# EAGLE board vocore2-eagle (EAGLE 7.7.0), part 1 of 2
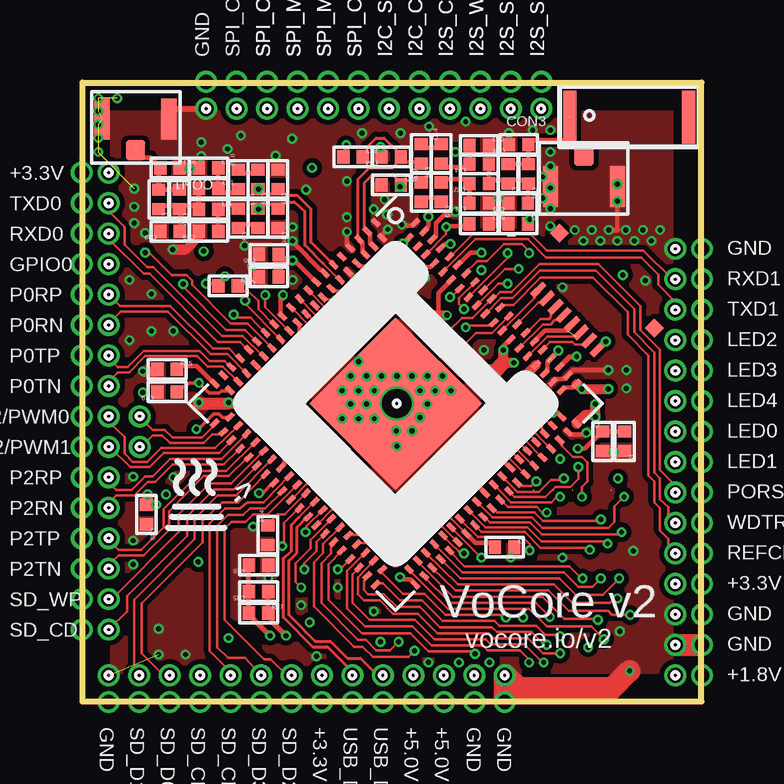
[diagram p0: board, top side]
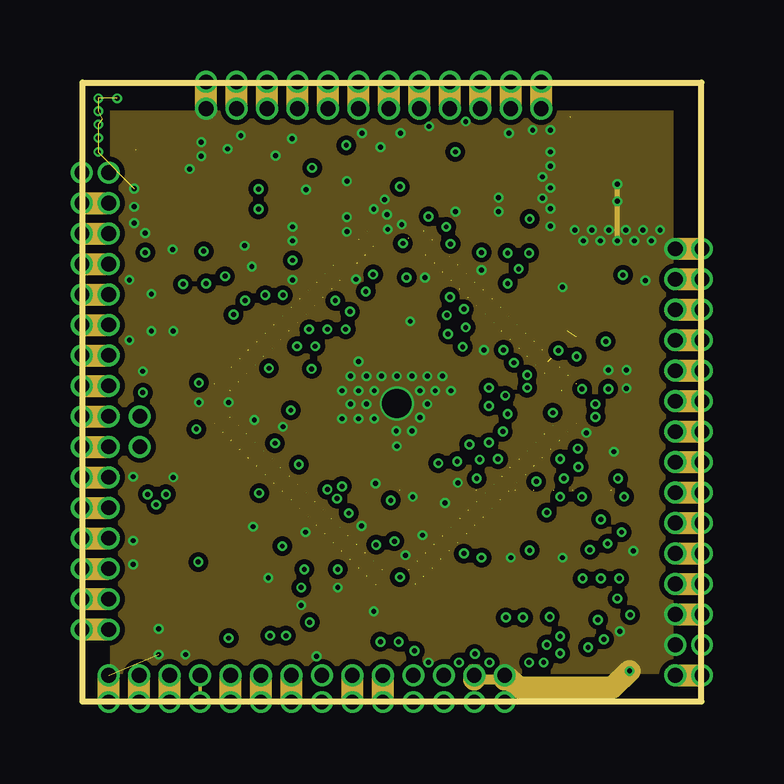
[diagram p1: board, inner layer Route2]
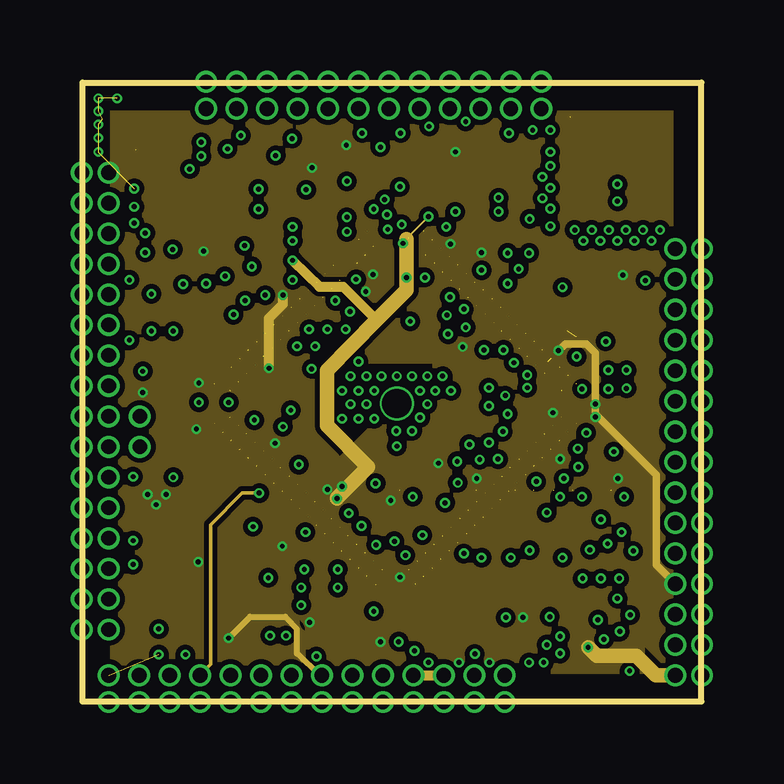
[diagram p2: board, inner layer Route3]
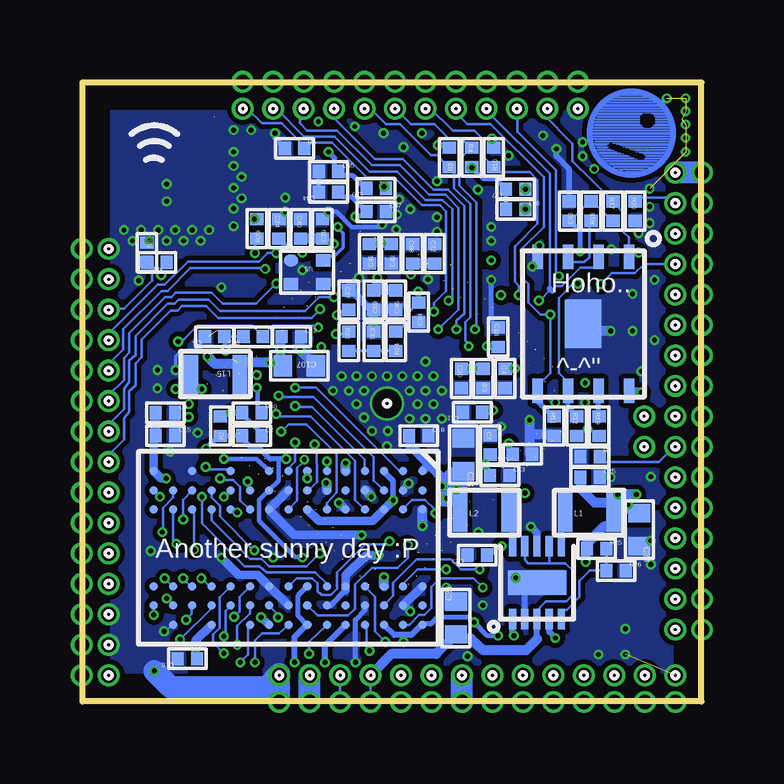
[diagram p3: board, bottom side, seen from below]

Size 25.81 x 25.81 mm. Coordinates in mm from the lower left corner, seen from the top.
Outline: 0,0 25.81,0 25.81,25.81 0,25.81 0,0
Copper layers (1*16): Top 0.035mm / dielectric 1.5mm / Bottom 0.035mm
Design rules "vocore2_pcad": minimum track width 10mil, minimum drill 24mil, track to track 8mil, track to pad 8mil, pad to pad 8mil, via to via 8mil, smd to smd 8mil, copper to edge 40mil, drill to drill 8mil, minimum pad ring 0mil, minimum via ring 0mil, stop-mask expansion 4mil, vias tented up to drill 0mil, thermal gap 10mil

## Footprints (pad centres in the part's own frame; a part is rotated, then mirrored left to right if it is on the bottom)
0402_1PRIMARY = smd 0.559 x 0.508: 1 0,0.406; 2 0,-0.406
0603_1PRIMARY = smd 0.762 x 0.914: 1 -0.686,0; 2 0.686,0
SMA$2F$UFLR_1PRIMARY = smd 0.813 x 0.813: 1 1.854,2.438 | smd 0.635 x 1.702: 2 3.251,1.143; 3 0.457,1.143
5020_1PRIMARY = smd 0.559 x 2.21: 1 -0.889,0.66; 2 4.064,0.66
0806_1PRIMARY = smd 0.61 x 1.626: 1 -1.016,-0.025; 2 1.016,-0.025
PORT_1PIN_DECAL_1PRIMARY = drill 0.61 pad 0.914: 1 0,0
PORT_1P5PIN_DECAL_1PRIMARY = drill 0.61 pad 0.914: 1 -0.051,0; 2 1.067,0
PORT_1PIN_DECALDA_1PRIMARY = drill 1.219 pad 1.422: 1 0,0
MT7628AN$2F$DRQFN156$2F$SMD$31PRIMARY = smd 0.203 x 0.406: 1 -4.75,-5.918; 2 -4.496,-5.283; 3 -4.242,-5.918; 4 -3.988,-5.283; 5 -3.759,-5.918; 6 -3.505,-5.283; 7 -3.251,-5.918; 8 -2.997,-5.283; 9 -2.743,-5.918; 10 -2.489,-5.283; 11 -2.261,-5.918; 12 -2.007,-5.283; 13 -1.753,-5.918; 14 -1.499,-5.283; 15 -1.245,-5.918; 16 -0.991,-5.283; 17 -0.762,-5.918; 18 -0.508,-5.283; 19 -0.254,-5.918; 20 0,-5.283; 21 0.254,-5.918; 22 0.508,-5.283; 23 0.762,-5.918; 24 0.991,-5.283; 25 1.245,-5.918; 26 1.499,-5.283; 27 1.753,-5.918; 28 2.007,-5.283; 29 2.261,-5.918; 30 2.489,-5.283; 31 2.743,-5.918; 32 2.997,-5.283; 33 3.251,-5.918; 34 3.505,-5.283; 35 3.759,-5.918; 36 3.988,-5.283; 37 4.242,-5.918; 38 4.496,-5.283; 39 4.75,-5.918; 79 4.75,5.918; 80 4.496,5.283; 81 4.242,5.918; 82 3.988,5.283; 83 3.759,5.918; 84 3.505,5.283; 85 3.251,5.918; 86 2.997,5.283; 87 2.743,5.918; 88 2.489,5.283; 89 2.261,5.918; 90 2.007,5.283; 91 1.753,5.918; 92 1.499,5.283; 93 1.245,5.918; 94 0.991,5.283; 95 0.762,5.918; 96 0.508,5.283; 97 0.254,5.918; 98 0,5.283; 99 -0.254,5.918; 100 -0.508,5.283; 101 -0.762,5.918; 102 -0.991,5.283; 103 -1.245,5.918; 104 -1.499,5.283; 105 -1.753,5.918; 106 -2.007,5.283; 107 -2.261,5.918; 108 -2.489,5.283; 109 -2.743,5.918; 110 -2.997,5.283; 111 -3.251,5.918; 112 -3.505,5.283; 113 -3.759,5.918; 114 -3.988,5.283; 115 -4.242,5.918; 116 -4.496,5.283; 117 -4.75,5.918 | smd 0.406 x 0.203: 40 5.918,-4.75; 41 5.283,-4.496; 42 5.918,-4.242; 43 5.283,-3.988; 44 5.918,-3.759; 45 5.283,-3.505; 46 5.918,-3.251; 47 5.283,-2.997; 48 5.918,-2.743; 49 5.283,-2.489; 50 5.918,-2.261; 51 5.283,-2.007; 52 5.918,-1.753; 53 5.283,-1.499; 54 5.918,-1.245; 55 5.283,-0.991; 56 5.918,-0.762; 57 5.283,-0.508; 58 5.918,-0.254; 59 5.283,0; 60 5.918,0.254; 61 5.283,0.508; 62 5.918,0.762; 63 5.283,0.991; 64 5.918,1.245; 65 5.283,1.499; 66 5.918,1.753; 67 5.283,2.007; 68 5.918,2.261; 69 5.283,2.489; 70 5.918,2.743; 71 5.283,2.997; 72 5.918,3.251; 73 5.283,3.505; 74 5.918,3.759; 75 5.283,3.988; 76 5.918,4.242; 77 5.283,4.496; 78 5.918,4.75; 118 -5.918,4.75; 119 -5.283,4.496; 120 -5.918,4.242; 121 -5.283,3.988; 122 -5.918,3.759; 123 -5.283,3.505; 124 -5.918,3.251; 125 -5.283,2.997; 126 -5.918,2.743; 127 -5.283,2.489; 128 -5.918,2.261; 129 -5.283,2.007; 130 -5.918,1.753; 131 -5.283,1.499; 132 -5.918,1.245; 133 -5.283,0.991; 134 -5.918,0.762; 135 -5.283,0.508; 136 -5.918,0.254; 137 -5.283,0; 138 -5.918,-0.254; 139 -5.283,-0.508; 140 -5.918,-0.762; 141 -5.283,-0.991; 142 -5.918,-1.245; 143 -5.283,-1.499; 144 -5.918,-1.753; 145 -5.283,-2.007; 146 -5.918,-2.261; 147 -5.283,-2.489; 148 -5.918,-2.743; 149 -5.283,-2.997; 150 -5.918,-3.251; 151 -5.283,-3.505; 152 -5.918,-3.759; 153 -5.283,-3.988; 154 -5.918,-4.242; 155 -5.283,-4.496; 156 -5.918,-4.75 | smd 5.08 x 5.08: 157 0,0
BGA-84_1PRIMARY = smd 0.356 x 0.356: 1 0,0; 2 -0.813,0; 3 -1.6,0; 4 -4.801,0; 5 -5.588,0; 6 -6.401,0; 7 0,0.813; 8 -0.813,0.813; 9 -1.6,0.813; 10 -4.801,0.813; 11 -5.588,0.813; 12 -6.401,0.813; 13 0,1.6; 14 -0.813,1.6; 15 -1.6,1.6; 16 -4.801,1.6; 17 -5.588,1.6; 18 -6.401,1.6; 19 0,2.388; 20 -0.813,2.388; 21 -1.6,2.388; 22 -4.801,2.388; 23 -5.588,2.388; 24 -6.401,2.388; 25 0,3.2; 26 -0.813,3.2; 27 -1.6,3.2; 28 -4.801,3.2; 29 -5.588,3.2; 30 -6.401,3.2; 31 0,3.988; 32 -0.813,3.988; 33 -1.6,3.988; 34 -4.801,3.988; 35 -5.588,3.988; 36 -6.401,3.988; 37 0,4.801; 38 -0.813,4.801; 39 -1.6,4.801; 40 -4.801,4.801; 41 -5.588,4.801; 42 -6.401,4.801; 43 0,5.588; 44 -0.813,5.588; 45 -1.6,5.588; 46 -4.801,5.588; 47 -5.588,5.588; 48 -6.401,5.588; 49 0,6.401; 50 -0.813,6.401; 51 -1.6,6.401; 52 -4.801,6.401; 53 -5.588,6.401; 54 -6.401,6.401; 55 -0.813,7.188; 56 -1.6,7.188; 57 -4.801,7.188; 58 -5.588,7.188; 59 -6.401,7.188; 60 0,8.001; 61 -0.813,8.001; 62 -1.6,8.001; 63 -4.801,8.001; 64 -5.588,8.001; 65 -0.813,8.788; 66 -1.6,8.788; 67 -4.801,8.788; 68 -5.588,8.788; 69 -6.401,8.788; 70 0,9.601; 71 -0.813,9.601; 72 -1.6,9.601; 73 -4.801,9.601; 74 -5.588,9.601; 75 -0.813,10.389; 76 -1.6,10.389; 77 -4.801,10.389; 78 -5.588,10.389; 79 -6.401,10.389; 80 0,11.201; 81 -0.813,11.201; 82 -1.6,11.201; 83 -4.801,11.201; 84 -5.588,11.201
GD25Q128CW_1PRIMARY = smd 1.016 x 0.432: 1 0.254,4.445; 2 0.254,3.175; 3 0.254,1.905; 4 0.254,0.635; 5 5.842,0.635; 6 5.842,1.905; 7 5.842,3.175; 8 5.842,4.445 | smd 2.032 x 1.524: 9 3.048,2.54
TPS62410DRCR_1PRIMARY = smd 0.305 x 0.864: 1 2.54,3.048; 2 2.032,3.048; 3 1.524,3.048; 4 1.016,3.048; 5 0.508,3.048; 6 0.508,0; 7 1.016,0; 8 1.524,0; 9 2.032,0; 10 2.54,0 | smd 2.438 x 1.016: 11 1.524,1.524
XTAL2520_1PRIMARY = smd 0.61 x 0.508: 1 0.381,0.381; 2 1.727,0.381; 3 1.727,1.372; 4 0.381,1.372
FH19SC-8S-0.5SH_1PRIMARY = smd 0.254 x 0.711: 1 1.245,2.896; 2 1.753,2.896; 3 2.235,2.896; 4 2.743,2.896; 5 3.251,2.896; 6 3.734,2.896; 7 4.242,2.896; 8 4.75,2.896 | smd 0.559 x 0.559: 9 0.203,0.61; 10 5.791,0.61

## Placement (x,y rotation side)
C1  0402  [0402_1PRIMARY]  17.6,6.43 270 top
C2  0402  [0402_1PRIMARY]  18.75,11.07 270 bottom
C3  0402  [0402_1PRIMARY]  21.69,10.85 0 top
C4  0402  [0402_1PRIMARY]  8.18,13.46 0 bottom
C5  0402  [0402_1PRIMARY]  20.29,15.21 90 bottom
C6  0402  [0402_1PRIMARY]  22.35,12.04 270 bottom
C7  0402  [0402_1PRIMARY]  8.81,10.69 0 bottom
C8  0402  [0402_1PRIMARY]  9.09,13.46 180 bottom
C9  0402  [0402_1PRIMARY]  6.5,20.14 180 top
C10  0402  [0402_1PRIMARY]  6.5,21.77 0 top
C11  0402  [0402_1PRIMARY]  9.55,12.07 90 bottom
C12  0402  [0402_1PRIMARY]  17.09,15.21 270 bottom
C13  0402  [0402_1PRIMARY]  8.41,9.42 270 bottom
C14  0402  [0402_1PRIMARY]  14.96,22.83 0 top
C15  0402  [0402_1PRIMARY]  22.35,11.07 270 bottom
C16  0402  [0402_1PRIMARY]  21.44,1.78 90 bottom
C18  0402  [0402_1PRIMARY]  11.79,11.07 270 bottom
C19  0402  [0402_1PRIMARY]  14.96,21.23 180 top
C20  0402  [0402_1PRIMARY]  10.01,13.46 0 bottom
C21  0402  [0402_1PRIMARY]  7.47,10.31 90 bottom
C22  0402  [0402_1PRIMARY]  11.13,18.67 0 bottom
C23  0402  [0402_1PRIMARY]  9.35,6.1 90 bottom
C24  0402  [0402_1PRIMARY]  17.63,19.71 0 bottom
C25  0402  [0402_1PRIMARY]  4.65,9.35 270 bottom
C27  0402  [0402_1PRIMARY]  14.71,16.74 0 bottom
C28  0402  [0402_1PRIMARY]  8.48,15.19 0 bottom
C29  0402  [0402_1PRIMARY]  3.53,12.9 90 top
C30  0402  [0402_1PRIMARY]  2.67,7.8 180 top
C31  0402  [0402_1PRIMARY]  13.67,15.01 0 bottom
C32  0603  [0603_1PRIMARY]  10.24,3.48 270 bottom
C33  0603  [0603_1PRIMARY]  2.59,7.16 90 bottom
C34  0603  [0603_1PRIMARY]  9.93,10.29 90 bottom
C35  0402  [0402_1PRIMARY]  7.34,4.57 90 top
C36  0402  [0402_1PRIMARY]  8.15,20.14 180 top
C37  0402  [0402_1PRIMARY]  8.15,21.77 180 top
C38  0402  [0402_1PRIMARY]  16.54,19.91 270 top
C39  0402  [0402_1PRIMARY]  15.8,19.71 180 bottom
C40  0402  [0402_1PRIMARY]  16.71,19.71 0 bottom
C41  0402  [0402_1PRIMARY]  13.84,18.67 180 bottom
C42  0402  [0402_1PRIMARY]  12.93,18.67 180 bottom
C43  0402  [0402_1PRIMARY]  7.77,17.7 90 top
C44  0402  [0402_1PRIMARY]  15.54,21.23 90 bottom
C45  0402  [0402_1PRIMARY]  7.77,18.64 90 top
C46  0402  [0402_1PRIMARY]  12.75,16.74 180 bottom
C47  0402  [0402_1PRIMARY]  13.56,20.42 270 bottom
C48  0402  [0402_1PRIMARY]  5.26,19.61 90 top
C49  0402  [0402_1PRIMARY]  3.66,19.61 90 top
C50  0402  [0402_1PRIMARY]  3.66,22.25 270 top
C51  0402  [0402_1PRIMARY]  5.26,21.39 270 top
C52  0402  [0402_1PRIMARY]  16.54,23.19 270 top
C53  0402  [0402_1PRIMARY]  18.16,20.78 90 top
C54  0402  [0402_1PRIMARY]  12.88,22.71 90 top
C55  0402  [0402_1PRIMARY]  12.88,21.54 270 top
C56  0402  [0402_1PRIMARY]  18.19,23.22 90 top
C57  0402  [0402_1PRIMARY]  16.54,21.59 90 top
C60  0402  [0402_1PRIMARY]  4.04,20.93 180 top
C61  0402  [0402_1PRIMARY]  18.59,22 180 top
C63  0402  [0402_1PRIMARY]  5.51,20.45 180 bottom
C64  0402  [0402_1PRIMARY]  11.79,16.23 180 bottom
C65  0402  [0402_1PRIMARY]  15.54,22.1 270 bottom
C68  0402  [0402_1PRIMARY]  12.04,18.67 0 bottom
C69  0402  [0402_1PRIMARY]  13.67,16.74 180 bottom
C107  0603  [0603_1PRIMARY]  16.76,14 180 bottom
CON1  SMA$2F$UFLR  [SMA$2F$UFLR_1PRIMARY]  4.06,25.43 180 top
CON2  5020  [5020_1PRIMARY]  24.38,25.02 180 top
CON3  SMA$2F$UFLR  [SMA$2F$UFLR_1PRIMARY]  19.05,20.32 0 top
D1  0402  [0402_1PRIMARY]  18.16,19.91 270 top
L1  0806  [0806_1PRIMARY]  4.67,7.9 0 bottom
L2  0806  [0806_1PRIMARY]  9.04,7.9 0 bottom
L3  0402  [0402_1PRIMARY]  3.17,20.93 180 top
L5  0402  [0402_1PRIMARY]  17.75,22 180 top
L15  0806  [0806_1PRIMARY]  20.27,13.61 180 bottom
L26  0402  [0402_1PRIMARY]  7.75,20.52 270 bottom
L27  0402  [0402_1PRIMARY]  7.75,21.36 90 bottom
L28  0402  [0402_1PRIMARY]  11.28,22.71 270 top
L29  0402  [0402_1PRIMARY]  13.56,21.39 90 bottom
L48  0402  [0402_1PRIMARY]  7.32,21.77 180 top
L49  0402  [0402_1PRIMARY]  7.32,20.14 0 top
L50  0402  [0402_1PRIMARY]  5.26,22.25 270 top
L51  0402  [0402_1PRIMARY]  5.26,20.52 270 top
L53  0402  [0402_1PRIMARY]  16.54,20.78 90 top
L54  0402  [0402_1PRIMARY]  16.54,22.4 90 top
L56  0402  [0402_1PRIMARY]  14.12,22.83 180 top
L57  0402  [0402_1PRIMARY]  14.12,21.23 0 top
LX01  PORT_1PIN_DECAL  [PORT_1PIN_DECAL_1PRIMARY]  2.39,11.89 180 top
LX02  PORT_1PIN_DECAL  [PORT_1PIN_DECAL_1PRIMARY]  2.39,10.62 180 top
PB00  PORT_1P5PIN_DECAL  [PORT_1P5PIN_DECAL_1PRIMARY]  1.09,1.04 270 top
PB01  PORT_1P5PIN_DECAL  [PORT_1P5PIN_DECAL_1PRIMARY]  2.36,1.04 270 top
PB02  PORT_1P5PIN_DECAL  [PORT_1P5PIN_DECAL_1PRIMARY]  3.63,1.04 270 top
PB03  PORT_1P5PIN_DECAL  [PORT_1P5PIN_DECAL_1PRIMARY]  4.9,1.04 270 top
PB04  PORT_1P5PIN_DECAL  [PORT_1P5PIN_DECAL_1PRIMARY]  6.17,1.04 270 top
PB05  PORT_1P5PIN_DECAL  [PORT_1P5PIN_DECAL_1PRIMARY]  7.44,1.04 270 top
PB06  PORT_1P5PIN_DECAL  [PORT_1P5PIN_DECAL_1PRIMARY]  8.71,1.04 270 top
PB07  PORT_1P5PIN_DECAL  [PORT_1P5PIN_DECAL_1PRIMARY]  9.98,1.04 270 top
PB08  PORT_1P5PIN_DECAL  [PORT_1P5PIN_DECAL_1PRIMARY]  11.25,1.04 270 top
PB09  PORT_1P5PIN_DECAL  [PORT_1P5PIN_DECAL_1PRIMARY]  12.52,1.04 270 top
PB10  PORT_1P5PIN_DECAL  [PORT_1P5PIN_DECAL_1PRIMARY]  16.33,1.04 270 top
PB11  PORT_1P5PIN_DECAL  [PORT_1P5PIN_DECAL_1PRIMARY]  17.6,1.04 270 top
PB12  PORT_1P5PIN_DECAL  [PORT_1P5PIN_DECAL_1PRIMARY]  13.79,1.04 270 top
PB13  PORT_1P5PIN_DECAL  [PORT_1P5PIN_DECAL_1PRIMARY]  15.06,1.04 270 top
PL00  PORT_1P5PIN_DECAL  [PORT_1P5PIN_DECAL_1PRIMARY]  1.04,22.05 180 top
PL01  PORT_1P5PIN_DECAL  [PORT_1P5PIN_DECAL_1PRIMARY]  1.04,20.78 180 top
PL02  PORT_1P5PIN_DECAL  [PORT_1P5PIN_DECAL_1PRIMARY]  1.04,19.51 180 top
PL03  PORT_1P5PIN_DECAL  [PORT_1P5PIN_DECAL_1PRIMARY]  1.04,18.24 180 top
PL04  PORT_1P5PIN_DECAL  [PORT_1P5PIN_DECAL_1PRIMARY]  1.04,16.97 180 top
PL05  PORT_1P5PIN_DECAL  [PORT_1P5PIN_DECAL_1PRIMARY]  1.04,15.7 180 top
PL06  PORT_1P5PIN_DECAL  [PORT_1P5PIN_DECAL_1PRIMARY]  1.04,14.43 180 top
PL07  PORT_1P5PIN_DECAL  [PORT_1P5PIN_DECAL_1PRIMARY]  1.04,13.16 180 top
PL08  PORT_1P5PIN_DECAL  [PORT_1P5PIN_DECAL_1PRIMARY]  1.04,11.89 180 top
PL09  PORT_1P5PIN_DECAL  [PORT_1P5PIN_DECAL_1PRIMARY]  1.04,10.62 180 top
PL10  PORT_1P5PIN_DECAL  [PORT_1P5PIN_DECAL_1PRIMARY]  1.04,9.35 180 top
PL11  PORT_1P5PIN_DECAL  [PORT_1P5PIN_DECAL_1PRIMARY]  1.04,8.08 180 top
PL12  PORT_1P5PIN_DECAL  [PORT_1P5PIN_DECAL_1PRIMARY]  1.04,6.81 180 top
PL13  PORT_1P5PIN_DECAL  [PORT_1P5PIN_DECAL_1PRIMARY]  1.04,5.54 180 top
PL14  PORT_1P5PIN_DECAL  [PORT_1P5PIN_DECAL_1PRIMARY]  1.04,4.27 180 top
PL15  PORT_1P5PIN_DECAL  [PORT_1P5PIN_DECAL_1PRIMARY]  1.04,3 180 top
PM00  PORT_1PIN_DECALDA  [PORT_1PIN_DECALDA_1PRIMARY]  13.11,12.42 0 top
PR00  PORT_1P5PIN_DECAL  [PORT_1P5PIN_DECAL_1PRIMARY]  24.77,18.87 0 top
PR01  PORT_1P5PIN_DECAL  [PORT_1P5PIN_DECAL_1PRIMARY]  24.77,17.6 0 top
PR02  PORT_1P5PIN_DECAL  [PORT_1P5PIN_DECAL_1PRIMARY]  24.77,16.33 0 top
PR03  PORT_1P5PIN_DECAL  [PORT_1P5PIN_DECAL_1PRIMARY]  24.77,15.06 0 top
PR04  PORT_1P5PIN_DECAL  [PORT_1P5PIN_DECAL_1PRIMARY]  24.77,13.79 0 top
PR05  PORT_1P5PIN_DECAL  [PORT_1P5PIN_DECAL_1PRIMARY]  24.77,12.52 0 top
PR06  PORT_1P5PIN_DECAL  [PORT_1P5PIN_DECAL_1PRIMARY]  24.77,11.25 0 top
PR07  PORT_1P5PIN_DECAL  [PORT_1P5PIN_DECAL_1PRIMARY]  24.77,9.98 0 top
PR08  PORT_1P5PIN_DECAL  [PORT_1P5PIN_DECAL_1PRIMARY]  24.77,8.71 0 top
PR09  PORT_1P5PIN_DECAL  [PORT_1P5PIN_DECAL_1PRIMARY]  24.77,7.44 0 top
PR10  PORT_1P5PIN_DECAL  [PORT_1P5PIN_DECAL_1PRIMARY]  24.77,6.17 0 top
PR11  PORT_1P5PIN_DECAL  [PORT_1P5PIN_DECAL_1PRIMARY]  24.77,4.9 0 top
PR12  PORT_1P5PIN_DECAL  [PORT_1P5PIN_DECAL_1PRIMARY]  24.77,3.63 0 top
PR13  PORT_1P5PIN_DECAL  [PORT_1P5PIN_DECAL_1PRIMARY]  24.77,2.36 0 top
PR14  PORT_1P5PIN_DECAL  [PORT_1P5PIN_DECAL_1PRIMARY]  24.77,1.09 0 top
PT00  PORT_1P5PIN_DECAL  [PORT_1P5PIN_DECAL_1PRIMARY]  5.16,24.77 90 top
PT01  PORT_1P5PIN_DECAL  [PORT_1P5PIN_DECAL_1PRIMARY]  6.43,24.77 90 top
PT02  PORT_1P5PIN_DECAL  [PORT_1P5PIN_DECAL_1PRIMARY]  7.7,24.77 90 top
PT03  PORT_1P5PIN_DECAL  [PORT_1P5PIN_DECAL_1PRIMARY]  8.97,24.77 90 top
PT04  PORT_1P5PIN_DECAL  [PORT_1P5PIN_DECAL_1PRIMARY]  10.24,24.77 90 top
PT05  PORT_1P5PIN_DECAL  [PORT_1P5PIN_DECAL_1PRIMARY]  11.51,24.77 90 top
PT06  PORT_1P5PIN_DECAL  [PORT_1P5PIN_DECAL_1PRIMARY]  12.78,24.77 90 top
PT07  PORT_1P5PIN_DECAL  [PORT_1P5PIN_DECAL_1PRIMARY]  14.05,24.77 90 top
PT08  PORT_1P5PIN_DECAL  [PORT_1P5PIN_DECAL_1PRIMARY]  15.32,24.77 90 top
PT09  PORT_1P5PIN_DECAL  [PORT_1P5PIN_DECAL_1PRIMARY]  16.59,24.77 90 top
PT10  PORT_1P5PIN_DECAL  [PORT_1P5PIN_DECAL_1PRIMARY]  17.86,24.77 90 top
PT11  PORT_1P5PIN_DECAL  [PORT_1P5PIN_DECAL_1PRIMARY]  19.13,24.77 90 top
R1  0402  [0402_1PRIMARY]  22.61,10.85 180 top
R2  0402  [0402_1PRIMARY]  20.07,11.48 180 bottom
R3  0402  [0402_1PRIMARY]  10.52,22.68 180 bottom
R4  0402  [0402_1PRIMARY]  9.58,22.68 0 bottom
R5  0402  [0402_1PRIMARY]  16.97,23.06 270 bottom
R6  0402  [0402_1PRIMARY]  23.11,18.72 180 bottom
R7  0402  [0402_1PRIMARY]  4.65,10.21 270 bottom
R9  0402  [0402_1PRIMARY]  22.71,18.31 90 bottom
R10  0402  [0402_1PRIMARY]  8.66,22.68 180 bottom
R11  0402  [0402_1PRIMARY]  6.15,11.48 0 bottom
R12  0402  [0402_1PRIMARY]  5.21,11.48 0 bottom
R13  0402  [0402_1PRIMARY]  18.69,15.21 90 bottom
R14  0402  [0402_1PRIMARY]  7.72,6.93 0 top
R15  0402  [0402_1PRIMARY]  3.53,13.84 270 top
R16  0402  [0402_1PRIMARY]  6.07,17.32 270 top
R17  0402  [0402_1PRIMARY]  3.68,20.45 0 bottom
R18  0402  [0402_1PRIMARY]  4.6,20.45 180 bottom
R19  0402  [0402_1PRIMARY]  4.27,11.48 0 bottom
R20  0402  [0402_1PRIMARY]  2.77,20.45 0 bottom
R23  0402  [0402_1PRIMARY]  14.71,15.01 0 bottom
R24  0402  [0402_1PRIMARY]  12.75,15.01 180 bottom
R25  0402  [0402_1PRIMARY]  4.37,6.38 270 bottom
R26  0402  [0402_1PRIMARY]  3.56,5.46 270 bottom
R27  0402  [0402_1PRIMARY]  7.34,3.68 270 top
R28  0402  [0402_1PRIMARY]  7.34,5.69 90 top
R29  0402  [0402_1PRIMARY]  18.54,19.71 180 bottom
R30  0402  [0402_1PRIMARY]  18.75,12.04 270 bottom
U1  MT7628AN$2F$DRQFN156$2F$SMD$2F$P0.5$2F$12X12  [MT7628AN$2F$DRQFN156$2F$SMD$31PRIMARY]  13.06,12.42 225 top
U2  BGA-84  [BGA-84_1PRIMARY]  11.63,9.6 90 bottom
U3  GD25Q128CW  [GD25Q128CW_1PRIMARY]  7.47,18.8 270 bottom
U4  TPS62410DRCR  [TPS62410DRCR_1PRIMARY]  5.33,6.48 180 bottom
U5  XTAL2520  [XTAL2520_1PRIMARY]  15.39,18.77 180 bottom
U8$2F$NC$2F$HIDE  FH19SC-8S-0.5SH  [FH19SC-8S-0.5SH_1PRIMARY]  24.41,15.85 134.9 top

## Library data of the parts
C1-C16 C18-C25 C27-C57 C60 C61 C63-C65 C68 C69 C107 CON1-CON3 D1 L1-L3 L5 L15 L26-L29 L48-L51 L53 L54 L56 L57 LX01 LX02 PB00 PB01-PB09 PB10-PB13 PL00 PL01-PL09 PL10-PL15 PM00 PR00 PR01-PR09 PR10-PR14 PT00 PT01-PT09 PT10 PT11 R1-R7 R9-R20 R23-R30 U1-U5 U8$2F$NC$2F$HIDE = vocore2_pcad

## Nets
$$$4985: C10.2 C51.1 L50.1
$$$5344: C49.2 C51.2 C60.1 L3.1 L51.2
$$$5504: C14.2 C52.2 L54.1
$$$5505: C53.2 C57.2 C61.1 L5.1 L54.2
$$$21554: C2.2 C3.1 R1.2 R2.1 U1.90 U1.104 U2.50
$$$26111: C50.2 C60.2 CON1.1 L3.2
$$$26247: C9.1 L49.2
$$$26315: C10.1 L48.2
$$$26342: C56.2 C61.2 CON2.2 CON3.1 L5.2
$$$26483: C14.1 L56.2
$$$26503: C19.1 L57.2
$$$30241: C9.2 C48.2 L51.1
$$$30244: C19.2 C57.1 L53.1
+1.2V: C1.2 C7.2 C8.2 C11.2 C12.2 C13.2 C20.1 C27.2 C28.2 C107.2 L15.1 U1.22 U1.58 U1.89 U1.91 U1.122 U1.131 U1.145
+1.8V: C2.1 C6.2 C15.2 C16.2 C18.2 C34.1 C35.2 C41.2 C42.2 C43.2 C44.2 C45.2 C46.2 C47.2 C69.2 L2.1 PR14.1 PR14.2 R2.2 R27.1 R30.2 U1.15 U1.79 U1.98 U1.116 U1.149 U1.154 U1.155 U2.1 U2.6 U2.13 U2.15 U2.16 U2.18 U2.25 U2.30 U2.37 U2.39 U2.40 U2.42 U2.49 U2.54 U2.69 U2.80
+3.3V: C4.1 C5.2 C21.1 C22.2 C23.2 C24.2 C25.2 C29.2 C30.2 C33.2 C39.1 C40.2 C63.1 C64.2 C65.1 C68.2 L1.2 L26.2 L27.1 L28.2 L29.1 PB07.1 PB07.2 PL00.1 PL00.2 PR11.1 PR11.2 R3.2 R4.2 R9.2 R12.2 R13.1 R17.2 R18.2 R19.2 R24.2 R25.2 U1.8 U1.14 U1.23 U1.32 U1.38 U1.41 U1.53 U1.60 U1.117 U1.123 U1.124 U1.134 U1.146 U1.150 U3.8 U4.4
+5V: C32.2 PB12.1 PB12.2 PB13.1 PB13.2 U4.3 U4.7 U4.9
DCDC_ADJ2: C35.1 R27.2 R28.1 U4.1
DCDC_DEF1: R25.1 R26.2 U4.5
DCDC_SW1: L1.1 U4.6
DCDC_SW2: L2.2 U4.10
DDR2_A0: U1.80 U2.68
DDR2_A1: U1.88 U2.66
DDR2_A2: U1.87 U2.67
DDR2_A3: U1.97 U2.71
DDR2_A4: U1.82 U2.74
DDR2_A5: U1.93 U2.72
DDR2_A6: U1.86 U2.73
DDR2_A7: U1.95 U2.75
DDR2_A8: U1.84 U2.78
DDR2_A9: U1.94 U2.76
DDR2_A10: U1.92 U2.65
DDR2_A11: U1.85 U2.77
DDR2_A12: U1.96 U2.81
DDR2_A13: U1.83 U2.84
DDR2_BA0: U1.100 U2.61
DDR2_BA1: U1.99 U2.62
DDR2_BA2: U1.101 U2.60
DDR2_CAS: U1.75 U2.63
DDR2_CKE: U1.103 U2.55
DDR2_CLK: U1.77 U2.53
DDR2_CLKN: U1.76 U2.58
DDR2_CS: U1.78 U2.64
DDR2_LDM: U1.108 U2.33
DDR2_LDQS: U1.113 U2.34
DDR2_MD0: U1.71 U2.41
DDR2_MD1: U1.107 U2.38
DDR2_MD2: U1.69 U2.46
DDR2_MD3: U1.105 U2.45
DDR2_MD4: U1.106 U2.43
DDR2_MD5: U1.73 U2.48
DDR2_MD6: U1.109 U2.31
DDR2_MD7: U1.70 U2.36
DDR2_MD8: U1.66 U2.17
DDR2_MD9: U1.112 U2.14
DDR2_MD10: U1.68 U2.22
DDR2_MD11: U1.110 U2.21
DDR2_MD12: U1.111 U2.19
DDR2_MD13: U1.67 U2.24
DDR2_MD14: U1.114 U2.7
DDR2_MD15: U1.65 U2.12
DDR2_ODT: U1.74 U2.59
DDR2_RAS: U1.81 U2.57
DDR2_UDM: U1.64 U2.9
DDR2_UDQS: U1.72 U2.10
DDR2_WE: U1.102 U2.56
DDRLDO18V: R30.1 U1.125
EPHY_VRT: R15.1 U1.39
FLASH_HOLD: R19.1 U3.7
FLASH_WP: R18.1 U3.3
GND: C1.1 C3.2 C4.2 C5.1 C6.1 C7.1 C8.1 C11.1 C12.1 C13.1 C15.1 C16.1 C18.1 C20.2 C21.2 C22.1 C23.1 C24.1 C25.1 C27.1 C28.1 C29.1 C30.1 C31.1 C32.1 C33.1 C34.2 C36.1 C37.2 C38.1 C39.2 C40.1 C41.1 C42.1 C43.1 C44.1 C45.1 C46.1 C47.1 C48.1 C49.1 C50.1 C52.1 C53.1 C54.1 C55.2 C56.1 C63.2 C64.1 C65.2 C68.1 C69.1 C107.1 CON1.2 CON1.3 CON3.2 CON3.3 D1.2 L50.2 L53.2 PB00.1 PB00.2 PB10.1 PB10.2 PB11.1 PB11.2 PM00.1 PR00.1 PR00.2 PR12.1 PR12.2 PR13.1 PR13.2 PT00.1 PT00.2 R1.1 R5.2 R6.2 R7.2 R10.2 R11.2 R14.2 R15.2 R20.2 R26.1 R28.2 U1.1 U1.2 U1.7 U1.10 U1.13 U1.63 U1.115 U1.120 U1.121 U1.128 U1.152 U1.156 U1.157 U2.3 U2.4 U2.8 U2.11 U2.20 U2.23 U2.27 U2.28 U2.32 U2.35 U2.44 U2.47 U2.51 U2.52 U2.70 U2.79 U3.4 U3.9 U4.2 U4.8 U4.11 U5.2 U5.3 U5.4
GPIO0: PL03.1 PL03.2 U1.29
I2C_CLK: PT07.1 PT07.2 R3.1 U1.20
I2C_SD: PT06.1 PT06.2 R4.1 U1.21
I2S_CLK: PT08.1 PT08.2 U1.19
I2S_SDI: PT10.1 PT10.2 U1.16
I2S_SDO: PT11.1 PT11.2 R5.1 U1.17
I2S_WS: PT09.1 PT09.2 U1.18
LED0: PR06.1 PR06.2 U1.143
LED1: PR07.1 PR07.2 U1.142
LED2: PR03.1 PR03.2 U1.141
LED3: PR04.1 PR04.2 U1.140
LED4: PR05.1 PR05.2 U1.139
LXBK: L15.2 U1.118 U1.119
MDI_P0RN: PL05.1 PL05.2 U1.34
MDI_P0RP: PL04.1 PL04.2 U1.33
MDI_P0TN: PL07.1 PL07.2 U1.36
MDI_P0TP: PL06.1 PL06.2 U1.35
MDI_P1RN: PL09.1 PL09.2 R7.1 U1.44
MDI_P1RP: PL08.1 PL08.2 U1.43
MDI_P1TN: LX02.1 U1.42
MDI_P1TP: LX01.1 U1.40
MDI_P2RN: PL11.1 PL11.2 U1.46
MDI_P2RP: PL10.1 PL10.2 U1.45
MDI_P2TN: PL13.1 PL13.2 U1.48
MDI_P2TP: PL12.1 PL12.2 U1.47
MDI_P3RN: PB02.1 PB02.2 U1.52
MDI_P3RP: PB01.1 PB01.2 U1.51
MDI_P3TN: PL15.1 PL15.2 U1.50
MDI_P3TP: PL14.1 PL14.2 U1.49
MDI_P4RN: PB04.1 PB04.2 U1.55
MDI_P4RP: PB03.1 PB03.2 U1.54
MDI_P4TN: PB06.1 PB06.2 U1.57
MDI_P4TP: PB05.1 PB05.2 U1.56
PCIE_CKN0: U1.132
PCIE_CKP0: U1.133
PCIE_RXN0: U1.130
PCIE_RXP0: U1.129
PCIE_TXN0: U1.126
PCIE_TXP0: U1.127
PERST_N: R13.2 U1.135
PORST: PR08.1 PR08.2 R23.1 U1.138
PORST_M: C31.2 R23.2 R24.1
REFCLK: PR10.1 PR10.2 U1.136
SPI_CLK: PT02.1 PT02.2 R12.1 R16.2 U3.6
SPI_CLK_O: R16.1 U1.25
SPI_CS0: PT01.1 PT01.2 R17.1 U1.28 U3.1
SPI_CS1: PT05.1 PT05.2 R10.1 U1.24
SPI_MISO: PT03.1 PT03.2 U1.26 U3.2
SPI_MOSI: PT04.1 PT04.2 R11.1 U1.27 U3.5
UART_RXD0: PL02.1 PL02.2 U1.31
UART_RXD1: PR01.1 PR01.2 U1.148
UART_TXD0: PL01.1 PL01.2 R20.1 U1.30
UART_TXD1: PR02.1 PR02.2 R6.1 R9.1 U1.147
USB_DM: PB09.1 PB09.2 U1.62
USB_DP: PB08.1 PB08.2 U1.61
USB_VRT: R14.1 U1.59
WDTRST: PR09.1 PR09.2 U1.137
WF0_RFION: C55.1 L29.2 L57.1 U1.3 U1.4
WF0_RFIOP: C54.2 L28.1 L56.1 U1.5 U1.6
WF1_RFION: C37.1 L27.2 L48.1 U1.11
WF1_RFIOP: C36.2 L26.1 L49.1 U1.12
WLED_M: D1.1 R29.2
WLED_O: R29.1 U1.144
XTALIN: C38.2 U1.151 U5.1